# Altium PCB SDC-BSPD-rev2.PcbDoc (part 2 of 2)
Units mm, origin at the board's own origin, x right, y up, seen from the top; angles counter-clockwise.
Board outline 122.75 x 70 mm, 2 copper layers (Top Layer, Bottom Layer); 79 components, 51 nets, 243 pads, 65 vias.
Unrouted connection lines stored in the file: 1.
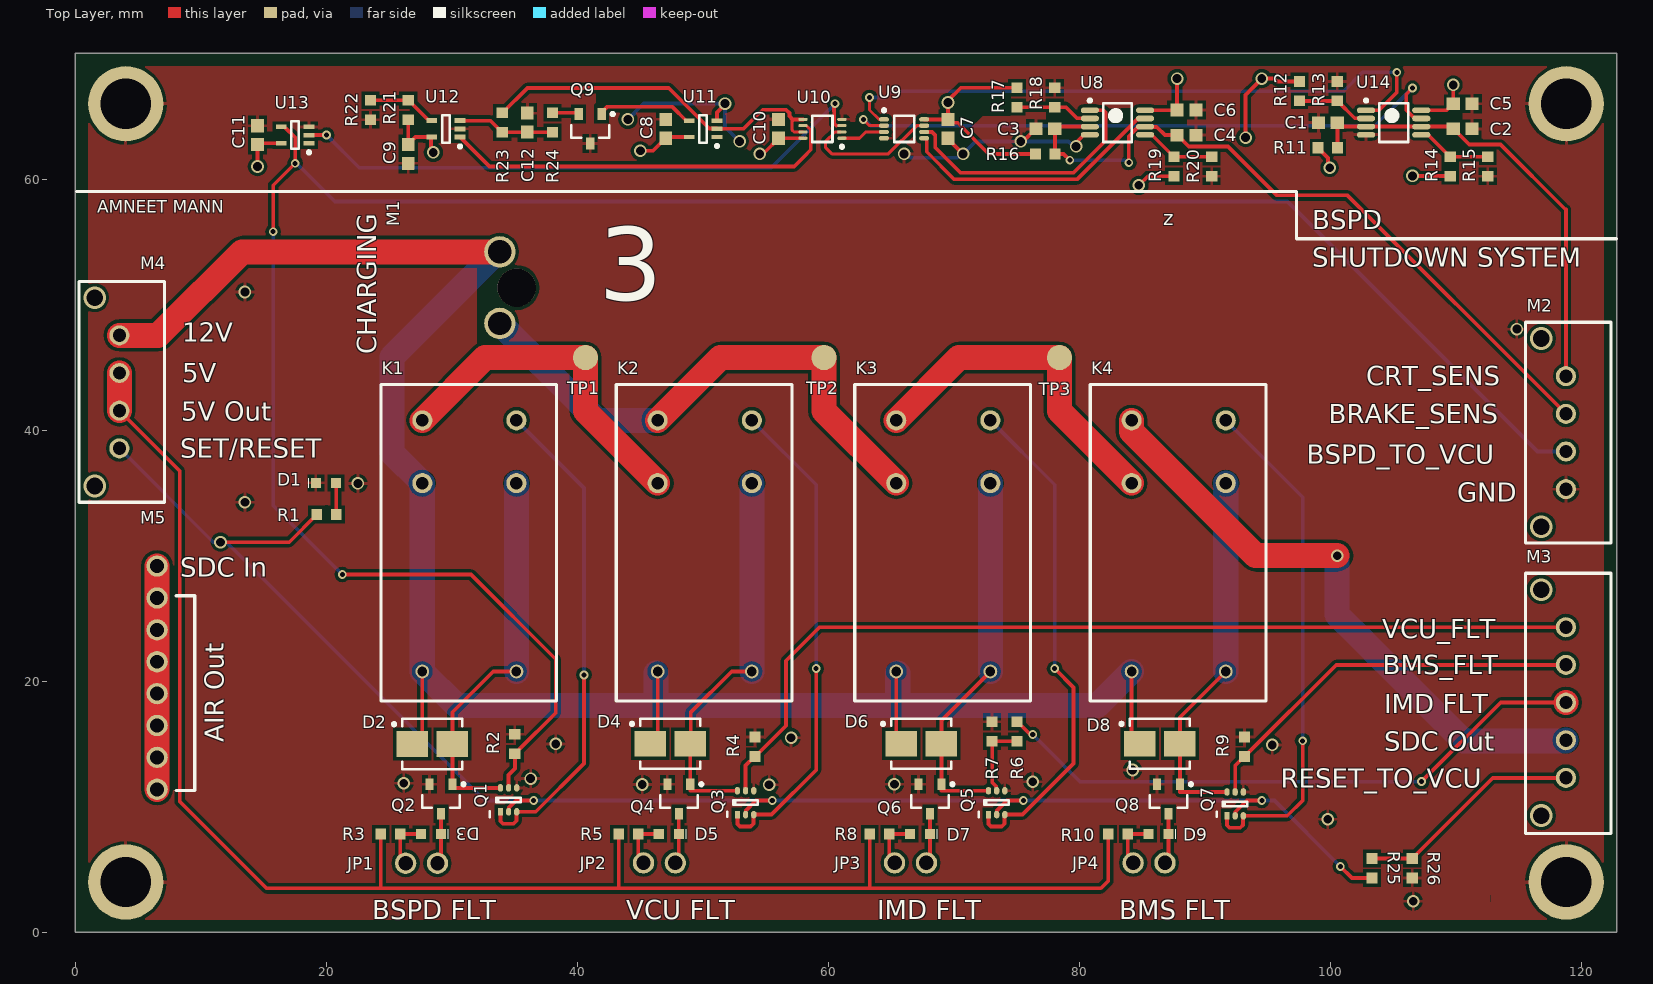
[diagram p0: Top Layer view]

## Via types
v1: diameter 1, hole 0.7, Top Layer to Bottom Layer, tented both sides, 37 vias
v2: diameter 0.7, hole 0.4, Top Layer to Bottom Layer, tented both sides, 22 vias
v3: diameter 1.8, hole 1.32, Top Layer to Bottom Layer, 6 vias

## Nets (pads, with @x,y where several pads share a name; then routed paths per layer and width w, separated by ;. In a path a pad name is that pad's centre, name@x,y a point inside that pad or via, vN(x,y) a via of type N, cw(c..) or ccw(c..) an arc to the next point about the centre after c; other vN are vias at no path point) (continued)
NetC3_2: (continued)
  Top Layer w0.3: v2(79.2,61.5) 78.7,62 R16.1 78.025,63.975 C3.2 78.175,64.175 U8.3 ; v2(83.9,61.3) 83.9,63.397 84.678,64.175 U8.6 85.221,64.154 86.121,64.154 86.775,63.5 C4.2 87.775,63.5 88.675,62.6 91.8,62.6 95.7,58.7 101.322,58.7 M2.2
  Bottom Layer w0.3: v2(79.2,61.5) 83.592,61.5 83.792,61.3 v2(83.9,61.3)
NetC12_2: C12.2 R23.2 R24.2 U12.3 | length 7.8
  Top Layer w0.3: U12.3 33.05,64.65 33.975,63.725 R23.2 35.975,63.725 C12.2 36.025,63.725 R24.2
NetD1_1: D1.1 R1.1 | length 2.5
  Top Layer w0.3: D1.1 20.763,35.787 20.763,33.413 20.775,33.4 R1.1@20.775,33.3
NetD2_2: D2.2 K1.1 K1.2 Q1.6 Q2.1 | length 31.4
  Top Layer w0.3: Q1.6@33.795,11.613 33.85,11.558 Q1.6 30.025,11.5 Q2.1 D2.2 30.025,17.525 33.275,20.775 K1.1
  Bottom Layer w2: K1.1 K1.2
NetD3_1: D3.1 JP1.2 R3.1 | length 4.1
  Top Layer w0.3: JP1.2 25.868,5.925 R3.1 D3.1
NetD3_2: D3.2 JP1.1 Q2.2 | length 4.1
  Top Layer w0.3: JP1.1 29.11,5.777 D3.2 Q2.2
NetD4_2: D4.2 K2.1 K2.2 Q3.6 Q4.1 | length 31.2
  Top Layer w0.3: Q3.6 48.975,11.275 Q4.1 D4.2 49,15.05 49,17.5 52.275,20.775 K2.1
  Bottom Layer w2: K2.1 K2.2
NetD5_1: D5.1 JP2.2 R5.1 | length 4.1
  Top Layer w0.3: JP2.2 44.818,5.95 R5.1 D5.1
NetD5_2: D5.2 JP2.1 Q4.2 | length 4
  Top Layer w0.3: JP2.1 48.06,5.802 D5.2 Q4.2
NetD6_2: D6.2 K3.1 K3.2 Q5.6 Q6.1 | length 29.8
  Top Layer w0.3: Q5.6@72.67,11.275 68.975,11.275 Q6.1 D6.2 68.975,16.875 K3.1
  Bottom Layer w2: K3.1 K3.2
NetD7_1: D7.1 JP3.2 R8.1 | length 4.1
  Top Layer w0.3: JP3.2 64.818,5.95 R8.1 D7.1
NetD7_2: D7.2 JP3.1 Q6.2 | length 4
  Top Layer w0.3: JP3.1 68.06,5.802 D7.2 Q6.2
NetD8_2: D8.2 K4.1 K4.2 Q7.6 Q8.1 | length 29.9
  Top Layer w0.3: K4.1 87.975,17.125 D8.2 Q8.1 87.975,11.175 Q7.6
  Bottom Layer w2: K4.1 K4.2
NetD9_1: D9.1 JP4.2 R10.1 | length 4.1
  Top Layer w0.3: JP4.2 83.818,5.95 R10.1 D9.1
NetD9_2: D9.2 JP4.1 Q8.2 | length 4
  Top Layer w0.3: JP4.1 87.06,5.802 D9.2 Q8.2
NetK1_3: K1.3 Q1.1 Q1.3 | length 39.4
  Top Layer w0.3: Q1.1 33.85,8.85 34.05,8.65 34.9,8.65 35.127,8.877 35.127,9.577 Q1.3 36.666,9.6 40.5,13.434 v2(40.5,20.5)
  Bottom Layer w0.3: K1.3 40.5,35.4 v2(40.5,20.5)
NetK1_4: K1.4 K2.5 TP1.1 | length 27.5
  Top Layer w2: K1.4 32.625,45.775 TP1.1 40.625,41.525 K2.5
NetK2_3: K2.3 Q3.1 Q3.3 | length 39.3
  Top Layer w0.3: Q3.1 52.725,8.625 52.925,8.425 53.775,8.425 54.002,8.652 Q3.3@54.002,9.352 ; Q3.3 55.441,9.375 59,12.934 v2(59,21)
  Bottom Layer w0.3: K2.3 59,35.65 v2(59,21)
NetK2_4: K2.4 K3.5 M1.2 TP2.1 | length 43.5
  Top Layer w2: K2.4 51.375,45.775 TP2.1 59.625,41.525 K3.5
  Bottom Layer w2: M1.2 41.525,40.775 K2.4
NetK3_3: K3.3 Q5.1 Q5.3 | length 40.4
  Top Layer w0.3: Q5.1 72.725,8.625 72.925,8.425 73.775,8.425 74.002,8.652 Q5.3@74.002,9.352 ; K3.3@72.85,41.025 72.875,41 K3.3 ; Q5.3 75.441,9.375 79.5,13.434 79.5,19.5 v2(78,21)
  Bottom Layer w0.3: K3.3 78,35.65 v2(78,21)
NetK3_4: K3.4 K4.5 TP3.1 | length 27.5
  Top Layer w2: K3.4 70.375,45.775 TP3.1 78.375,41.525 K4.5
NetK4_3: K4.3 Q7.1 Q7.3 | length 40.9
  Top Layer w0.3: Q7.1 91.725,8.525 91.925,8.325 92.775,8.325 93.002,8.552 Q7.3@93.002,9.252 ; Q7.3 96.525,9.275 97.75,10.5 v2(97.75,15.25)
  Bottom Layer w0.3: K4.3 97.75,34.65 v2(97.75,15.25)
NetK4_4: K4.4 M3.4 | length 48.5
  Top Layer w2: K4.4 84.125,39.875 94,30 v1(100.5,30)
  Bottom Layer w2: v1(100.5,30) 100.5,25.311 110.561,15.25 118.674,15.25 M3.4
NetM2_3: M2.3 Q1.5 R2.1 U13.4 | length 181.6
  Top Layer w0.3: v2(15.75,55.804) 15.75,59.5 v2(17.5,61.25) 17.5,63.3 16.65,64.15 U13.4 ; v2(21.25,28.5) 31.5,28.5 38.25,21.75 38.25,17.475 35.3,14.525 35.3,14.5 35.025,14.225 R2.1 35,13.036 34.5,12.536 Q1.5
  Bottom Layer w0.3: v2(15.75,55.804) 15.75,34 v2(21.25,28.5) ; v2(17.5,61.25) 17.608,61.25 20.658,58.2 96.55,58.2 116.451,38.299 M2.3
NetM3_1: M3.1 Q3.5 R4.1 | length 74.9
  Top Layer w0.3: Q3.5 53.375,13.275 54.1,14 R4.1 54.15,14 56.6,16.45 56.6,21.625 59.274,24.299 M3.1
NetM3_2: M3.2 Q7.5 R9.1 | length 31.8
  Top Layer w0.3: Q7.5 92.375,13.275 93.1,14 R9.1 100.424,21.299 M3.2
NetM3_3: M3.3 R6.1 | length 48.3
  Top Layer w0.3: R6.1 75.025,16.775 75.973,15.827 76.173,15.827 v2(76.25,15.75) ; v2(107.225,12) 113.524,18.299 M3.3
  Bottom Layer w0.3: v2(76.25,15.75) 80.004,11.996 107.221,11.996 v2(107.225,12)
NetM3_5: M3.5 R25.1 R26.2 | length 18.1
  Top Layer w0.3: R25.1 R26.2 112.899,12.299 M3.5
NetM4_4: M4.4 Q1.2 Q3.2 Q5.2 Q7.2 R1.2 R25.2 | length 133.5
  Top Layer w0.3: v1(11.55,31.075) 17.025,31.075 R1.2 R1.2@19.225,33.3 ; Q1.2 34.523,9.623 34.523,9.931 35.092,10.5 v2(36.5,10.5) ; Q3.2 53.398,9.398 53.398,9.706 54.192,10.5 v2(55.5,10.5) ; Q5.2 73.398,9.398 73.398,9.706 74.192,10.5 v2(75.5,10.5) ; Q7.2 92.398,9.298 92.398,9.606 93.292,10.5 v2(94.5,10.5) ; v2(100.75,5.25) 101.675,4.325 R25.2
  Bottom Layer w0.3: M4.4 10.975,31.075 v1(11.55,31.075) 12.025,31.075 32.6,10.5 v2(36.5,10.5) v2(55.5,10.5) v2(75.5,10.5) v2(94.5,10.5) 95.5,10.5 v2(100.75,5.25)
NetM5_1: M5.1 M5.2 M5.3 M5.4 M5.5 M5.6 M5.7 M5.8 | length 17.8
  Top Layer w2: M5.8 M5.7 M5.6 M5.5 M5.4 M5.3 M5.2 M5.1
NetQ5_5: Q5.5 R6.2 R7.1 | length 6.1
  Top Layer w0.3: R7.1 R7.1@73.025,15.225 ; Q5.5 73.352,11.298 73.352,11.473 73.339,11.486 73.339,11.619 73.025,11.933 R7.1@73.025,15.225 ; R6.2 R7.1@73.025,15.225
NetQ9_1: Q9.1 U11.4 | length 7.8
  Top Layer w0.3: Q9.1 41.915,65.325 42.34,65.75 47.55,65.75 48.65,64.65 U11.4
NetQ9_3: Q9.3 R24.1 | length 2.1
  Top Layer w0.3: R24.1 39.985,65.275 Q9.3
NetR19_1: R19.1 R20.2 U8.5 | length 6
  Top Layer w0.3: U8.5 85.725,63.525 87.475,61.775 R19.1 R20.2
NetR21_1: R21.1 R22.2 U12.4 | length 5.5
  Top Layer w0.3: R22.2 R21.1 26.525,66.275 26.8,66 28.15,64.65 U12.4
NetU8_1: U8.1 U9.6 | length 21
  Top Layer w0.3: U9.6 68.225,63.75 68.475,63.5 68.475,62.525 70.5,60.5 79.5,60.5 82.051,63.051 82.051,65.299 81.875,65.475 U8.1
NetU8_7: U8.7 U9.5 | length 21.5
  Top Layer w0.3: U9.5 67.8,63.05 67.8,62.175 70,59.975 79.775,59.975 84.55,64.75 84.584,64.75 84.659,64.825 U8.7
NetU9_1: U9.1 U14.1 | length 50
  Top Layer w0.25: v2(63.25,66.5) 63.25,65.5 64,64.75 U9.1@64.45,64.75
  Top Layer w0.3: U14.1 103.83,65.475 105.25,66.895 v2(105.25,68.5)
  Bottom Layer w0.3: v2(63.25,66.5) 64.5,66.5 65,67 101.028,67 102.528,68.5 v2(105.25,68.5)
NetU9_2: U9.2 U14.7 | length 50.6
  Top Layer w0.25: v2(62.75,64.75) 63.25,64.25 63.5,64.25 U9.2 U9.2@64.5,64.25
  Top Layer w0.3: v2(106.5,67.25) 106,66.75 106,65.503 106.678,64.825 U14.7
  Bottom Layer w0.3: v2(62.75,64.75) 62.858,64.75 63.358,64.25 103.5,64.25 v2(106.5,67.25)
NetU9_3: U9.3 U10.1 | length 3.6
  Top Layer w0.25: U10.1 62.451,63.25 62.951,63.75 U9.3
NetU9_7: U9.7 U10.2 | length 11
  Top Layer w0.25: U10.2@60.95,63.75 60.5,63.75 59.75,63 59.75,62.5 60.25,62 64.75,62 67,64.25 U9.7
NetU10_3: U10.3 U13.2 | length 47.4
  Top Layer w0.25: 60.601,64.25 U10.3
  Top Layer w0.27: 60.425,64.426 60.601,64.25
  Top Layer w0.28: 60.425,64.426 60.425,65.425
  Top Layer w0.3: U13.2 v2(20,63.5) ; 60.425,65.425 60.425,65.925 v2(60.5,66)
  Bottom Layer w0.3: v2(20,63.5) 22.6,60.9 55.4,60.9 v2(60.5,66)
NetU10_6: U10.6 U12.1 | length 31.8
  Top Layer w0.25: U10.6 58.23,64.25 58.575,63.905
  Top Layer w0.27: 58.575,62.325 58.575,63.905
  Top Layer w0.28: 58.25,62 58.575,62.325
  Top Layer w0.3: U12.1 32.975,61 57.25,61 58.25,62
V_LOGIC: R23.1 U10.5 U10.7 U11.2 | length 29
  Top Layer w0.25: 57.232,64.744 57.086,64.597 57.086,63.896 57.232,63.75 U10.7
  Top Layer w0.3: R23.1 34.025,65.275 36,67.25 47.254,67.25 50.479,64.025 51.075,64.025 U11.2 53.214,64 54.739,65.525 56.604,65.525 56.864,65.264 56.864,65.011 57.125,64.75 57.7,64.75 U10.5
pads on no net: M1. U11.1 U11.3 U13.1
copper on no net: | length 13.4
  Top Layer w0.3: 51.1,64.65 51.1,65.305 51.737,65.942 v1(51.737,66.011)
  Bottom Layer w0.3: v1(44,64.75) 45.261,66.011 v1(51.737,66.011) 51.737,64.163 v1(52.9,63)
  other v3: 116.763,9.299 116.763,27.299 116.763,32.299 1.54,35.55 116.763,47.299 1.54,50.55

## Polygon pours and split planes (outlines as drawn)
GND on Bottom Layer "GND_L02_P005" (solid, pour order 5): 1,40.5 1,1 121.75,1 121.75,58.75 10.95,58.75 10.9,58.8 10.9,40.541 1.041,40.541
5V on Bottom Layer "5V_L02_P002" (solid, remove dead copper, pour order 2): 1,69 121.75,69 121.75,58.75 1,58.75
5V on Bottom Layer "5V_L02_P003" (solid, pour order 3): 1,40.275 10.9,40.275 10.9,59.3 1,59.3 1,59.4
GND on Top Layer "GND_L01_P000" (solid, remove dead copper, pour order 0): 1,69 1,1 121.75,1 121.75,69

## Other copper
Top Layer:
  pour cut-out: 112.7,2.949 112.7,2.425 112.702,2.427 112.702,2.948
  pour cut-out: 32,47.1 32,52.9 31.9,53 33.445,53 33.817,52.628 33.817,50.072 33.276,50.072 32.318,49.114 32.318,47.953 33.104,47.167 33.072,47.135 33.072,47.04 32.162,47.04 31.993,46.87
  pour cut-out: 19.904,34.004 20.096,34.004 20.096,32.596 19.904,32.596
  pour cut-out: 108.796,61.096 108.796,60.649 109.051,60.904 110.204,60.904 110.204,61.096
  pour cut-out: 99.127,63.746 99.2,63.673 99.2,63.2 99.65,63.2 99.654,63.204 99.75,63.108 99.75,62.364 99.778,62.392 99.846,62.392 99.846,63.204 100.113,63.204 100.113,63.746
  pour cut-out: 63.787,63.058 64.033,62.813 64.759,62.813 65.029,63.083 65.283,63.083 64.59,62.39 64.59,62.386 63.66,62.386 63.66,63.037 63.766,63.037
  pour cut-out: 61.589,64.5 61.603,64.514 62.287,64.514 62.674,64.127 62.674,64.02 62.291,63.636 61.764,63.636 61.764,63.672 61.589,63.848
  pour cut-out: 41.336,65.904 41.5,66.068 41.5,66.9 47.021,66.9 47.649,66.272 47.587,66.209 47.587,66.155 42.206,66.155 41.956,65.904
  pour cut-out: 45.279,61.412 45.254,61.437 45.254,61.539 45.335,61.539 45.666,61.869 46.202,61.869 46.804,62.471 47.754,62.471 47.754,62.938 47.771,62.921 49.579,62.921 49.579,63.779 49.562,63.762 47.754,63.762 47.754,64.798 47.803,64.846 47.871,64.846 48.221,64.496 48.221,64.221 49.629,64.221 49.665,64.256 50.296,63.625 50.421,63.625 50.421,62.921 51.779,62.921 51.779,63.588 52.241,63.588 52.241,62.958 52.156,62.873 52.362,62.667 52.362,62.462 52.567,62.462 52.773,62.256 52.858,62.341 53.317,62.341 53.438,62.462 53.703,62.197 53.765,62.197 53.765,61.677 53.903,61.539 53.841,61.476 53.841,61.412
  pour cut-out: 70.254,63.748 70.254,63.029 70.624,62.659 71.08,62.659 71.444,62.295 71.444,61.705 71.238,61.499 71.238,61.462 71.094,61.462 70.888,61.256 70.512,61.256 70.503,61.265 70.42,61.182 70.42,61.162 70.671,60.912 78.764,60.912 78.764,61 78.803,61.039 78.625,61.217 78.625,61.296 77.346,61.296 77.346,62.704 77.613,62.704 77.613,63.246 76.627,63.246 76.6,63.273 76.6,63.5 76.3,63.5 76.373,63.427 76.373,63.246 76.304,63.246 76.038,62.981 76.038,62.779 76.113,62.704 77.154,62.704 77.154,61.296 75.796,61.296 75.796,61.588 72.579,61.588 70.371,63.796 70.303,63.796 70.254,63.748 70.254,63.377 69.923,63.377 70,63.3 70,63.1 70.231,63.1 70.254,63.123 70.543,62.834 70.543,62.74
  pour cut-out: 15.721,63.721 15.692,63.75 15.25,63.75 15.25,63.3 15.271,63.279 15.713,63.721
  pour cut-out: 15.254,63.262 15.262,63.262 15.721,63.721 16.579,63.721 16.8,63.5 16.773,63.473 16.773,63.279 15.271,63.279
  pour cut-out: 27.204,64.848 27.204,64.046 26.912,64.046 26.912,63.882 27.039,63.755 27.046,63.762 29.012,63.762 29.054,63.804 29.054,64.196 27.696,64.196 27.696,64.521 27.321,64.896 27.273,64.848
  pour cut-out: 63.66,63.364 63.66,62.34 63.614,62.386 60.41,62.386 60.136,62.66 60.136,62.84 60.336,63.039 60.354,63.021 60.524,63.021 60.652,62.893 62.64,62.893 63.111,63.364
  pour cut-out: 74.55,67 74.5,66.95 74.5,65 72.25,65 71.25,64 70.362,64.888 70.274,64.888 70.274,65.495 70.113,65.656 70.203,65.746 70.203,66.37 70.833,67
  pour cut-out: 82.342,65.591 84.177,65.591 84.249,65.662 84.5,65.411 84.5,65 79.5,60 79,60.5 79.359,60.5 82.463,63.604 82.342,63.725 82.342,65.591 84.177,65.591 84.249,65.662
  pour cut-out: 77.296,65.313 77.296,64.521 77.25,64.475 77.475,64.25 79.85,64.25 79.85,65.35 79.813,65.313
  pour cut-out: 88.5,63.975 86.025,63.975 86,64 86,65.25 88.5,65.25
  pour cut-out: 99.796,65.813 99.796,65.021 99.775,65 101,65 101,65.75 100.937,65.813
  pour cut-out: 103.788,64.175 103.863,64.25 106.5,64.25 106.5,66.634 106.384,66.75 104.5,66.75 104.5,66.727 103.66,65.887 103.788,65.758
  pour cut-out: 108.15,65.475 108.15,64.5 110.475,64.5 110.5,64.475 110.5,65.525 108.2,65.525
Bottom Layer:
  pour cut-out: 33.484,52.295 26.789,45.6 26.6,45.6 26.49,45.49 26.49,38.699 28.89,36.299 28.89,21.299 30.874,19.315 81.116,19.315 83.798,21.997 84.125,21.669 90.369,21.669 90.4,21.7 90.53,21.57 90.53,20.143 90.993,20.143 91.625,19.51 92.562,20.448 92.847,20.448 92.847,20.208 92.149,19.51 97.39,19.51 97.338,19.562 97.338,34.479 91.625,40.192 91.625,41.838 42.251,41.838 33.387,50.702 33.387,51.699
  pour cut-out: 81.004,11.584 81.004,10.896 81.1,10.8 81.369,11.069 94.736,11.069 94.736,11.664 94.7,11.7 94.584,11.584
  pour cut-out: 65.2,64 65.2,62.522 65.341,62.38 65.696,62.735 66.304,62.735 66.659,62.38 66.659,62.199 66.746,62.112 69.954,62.112 69.954,62.33 70.364,62.74 70.902,62.74 71.574,63.412 74.747,63.412 75.046,63.711 75.021,63.736 75.021,63.838 65.362,63.838
  pour cut-out: 75.579,63.838 75.554,63.813 75.554,63.711 75.635,63.711 75.966,63.381 79.312,63.381 79.434,63.259 80.08,63.259 80.461,62.878 80.461,62.322 80.238,62.099 80.238,61.925 80.25,61.912 80.254,61.916 83.9,61.916 83.9,63.8 83.862,63.838

## Silkscreen, mask and mechanical layers (free items; w line width, h text height)
Top Overlay:
  lines w0.2: 33,9.175 33,9.625 ; 51.9,9.2 51.9,9.6 ; 71.95,9.15 71.95,9.6 ; 90.9,9.2 90.9,9.6
  lines w0.254: 0.1,59 97.25,59 97.25,55.25 122.75,55.25 ; 8,11.3 9.5,11.3 9.5,26.8 8,26.8
  text "AMNEET MANN" at 1.75,57.3 h1
  text "BSPD" at 98.504,56.004 h1.52
  text "z" at 86.65,55.925 h2
  text "SHUTDOWN SYSTEM" at 98.504,53.004 h1.52
  text "3" at 41.7,48.45 h10
  text "12V" at 8.504,47.054 h1.52
  text "CHARGING" at 23.946,46.054 h1.52 r90
  text "5V" at 8.504,43.804 h1.52
  text "CRT_SENS" at 102.817,43.557 h1.52
  text "5V Out" at 8.442,40.765 h1.52
  text "BRAKE_SENS" at 99.817,40.557 h1.52
  text "SET/RESET" at 8.354,37.804 h1.52
  text "BSPD_TO_VCU" at 98.067,37.307 h1.52
  text "GND" at 110.067,34.303 h1.52
  text "SDC In" at 8.354,28.304 h1.52
  text "VCU_FLT" at 104.092,23.421 h1.52
  text "BMS_FLT" at 104.142,20.557 h1.52
  text "IMD FLT" at 104.267,17.453 h1.52
  text "AIR Out" at 11.796,15.154 h1.52 r90
  text "SDC Out" at 104.267,14.453 h1.52
  text "RESET_TO_VCU" at 96.004,11.508 h1.52
  text "BSPD FLT" at 23.629,1.029 h1.52
  text "VCU FLT" at 43.879,1.029 h1.52
  text "IMD FLT" at 63.879,1.029 h1.52
  text "BMS FLT" at 83.129,1.029 h1.52
Bottom Overlay:
  lines w0.254: 8.007,11.412 9.507,11.412 9.507,26.912 8.007,26.912
  text "CHARGING" at 23.946,57.446 h1.52 r90
  text "12V" at 12.496,47.054 h1.52
  text "5V" at 11.096,43.804 h1.52
  text "CRT_SENS" at 114.559,43.557 h1.52
  text "5V Out" at 16.558,40.765 h1.52
  text "BRAKE_SENS" at 114.559,40.557 h1.52
  text "SET/RESET" at 21.546,37.804 h1.52
  text "BSPD_TO_VCU" at 114.309,37.307 h1.52
  text "GND" at 114.059,34.303 h1.52
  text "SDC In" at 16.896,28.304 h1.52
  text "AIR Out" at 11.834,24.584 h1.52 r90
  text "VCU_FLT" at 114.209,23.382 h1.52
  text "BMS_FLT" at 114.259,20.582 h1.52
  text "IMD FLT" at 114.109,17.453 h1.52
  text "SDC Out" at 113.996,14.504 h1.52
  text "RESET_TO_VCU" at 113.746,11.508 h1.52
Board Outline:
  lines w0.254: 122.75,0.25 122.75,0 0,0 0,70 122.75,70 ; 122.813,0 122.813,70

## Dimensions
0,70 to 0,0 on Mechanical 1
0,0 to 122.75,0 on Mechanical 1